# EAGLE board fpc2n64a_v3 (EAGLE 9.0.1)
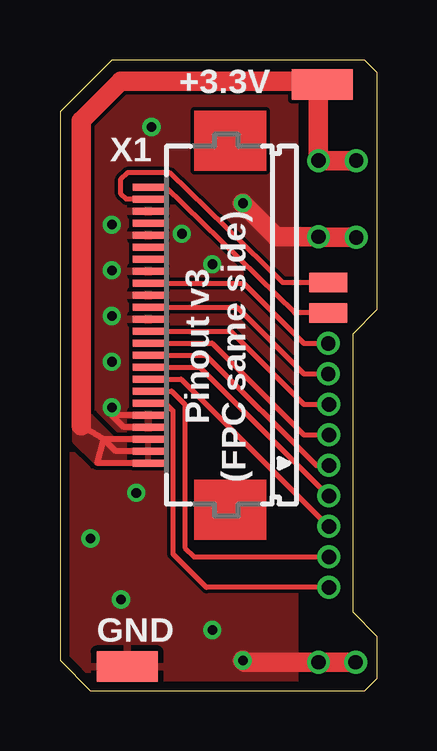
[diagram p0: board, top side]
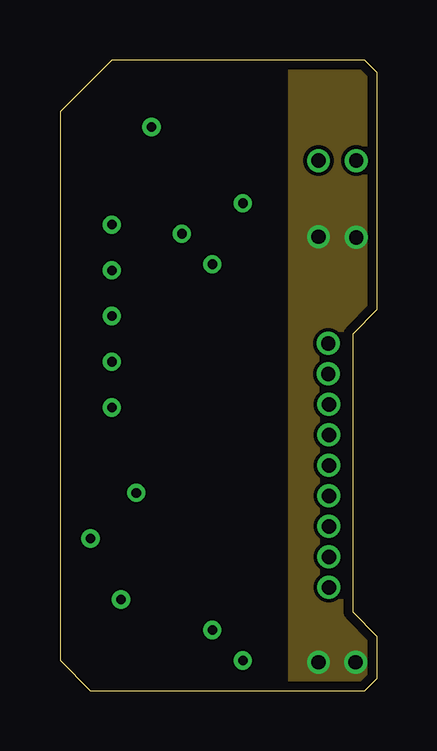
[diagram p1: board, inner layer Route2]
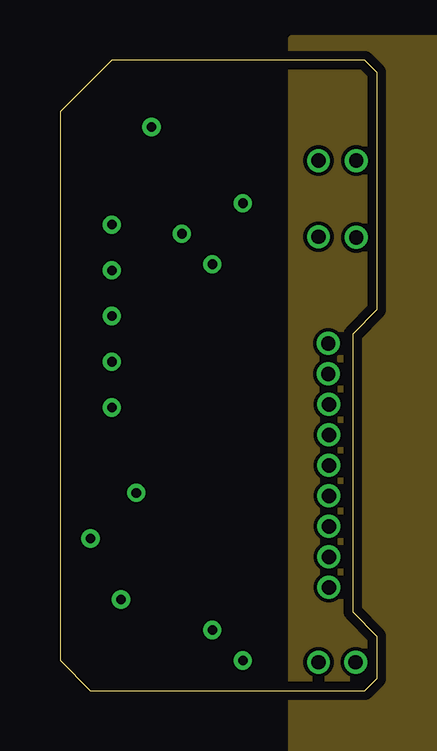
[diagram p2: board, inner layer Route15]
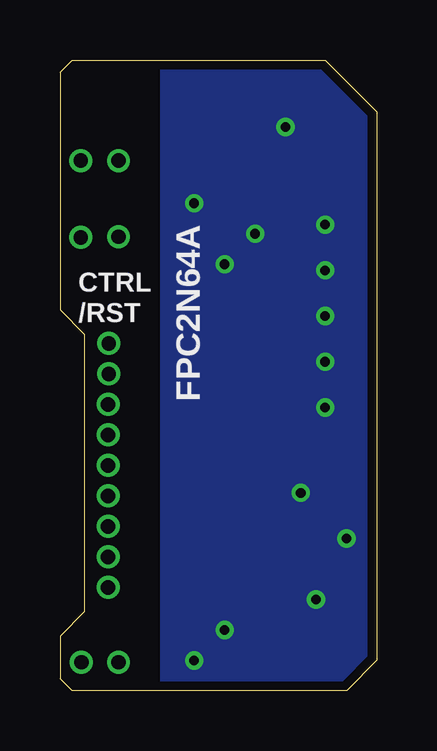
[diagram p3: board, bottom side, seen from below]

Size 13.21 x 26.29 mm. Coordinates in mm from the lower left corner, seen from the top.
Outline: 12.7,0 13.21,0.51 13.21,2.29 12.19,3.3 12.19,14.86 13.21,15.88 13.21,25.78 12.7,26.29 2.16,26.29 0,24.13 0,1.27 1.27,0 12.7,0
Copper layers (1*16): Top 0.0356mm / dielectric 1.5011mm / Bottom 0.0356mm
Design rules "LaenPCBOrder": minimum track width 6mil, minimum drill 13mil, track to track 6mil, track to pad 6mil, pad to pad 6mil, via to via 6mil, smd to smd 6mil, copper to edge 15mil, drill to drill 6mil, minimum pad ring 7mil, minimum via ring 7mil, stop-mask expansion 3mil, vias tented up to drill 30mil, thermal gap 10mil

## Footprints (pad centres in the part's own frame; a part is rotated, then mirrored left to right if it is on the bottom)
SMD0,8-1,6 = smd 0.8 x 1.6: P$1 0,0
SMD1,27-2,54 = smd 1.27 x 2.54: 1 0,0
FH12-24S-0.5SH = smd 0.3 x 1.3: 1 -5.75,3.25; 2 -5.25,3.25; 3 -4.75,3.25; 4 -4.25,3.25; 5 -3.75,3.25; 6 -3.25,3.25; 7 -2.75,3.25; 8 -2.25,3.25; 9 -1.75,3.25; 10 -1.25,3.25; 11 -0.75,3.25; 12 -0.25,3.25; 13 0.25,3.25; 14 0.75,3.25; 15 1.25,3.25; 16 1.75,3.25; 17 2.25,3.25; 18 2.75,3.25; 19 3.25,3.25; 20 3.75,3.25; 21 4.25,3.25; 22 4.75,3.25; 23 5.25,3.25; 24 5.75,3.25

## Placement (x,y rotation side)
/RST  [SMD0,8-1,6]  11.18,15.75 90 top
CTRL  [SMD0,8-1,6]  11.18,17.02 90 top
GND  [SMD1,27-2,54]  2.79,1.02 270 top
VCC  [SMD1,27-2,54]  10.92,25.27 90 top
X1  [FH12-24S-0.5SH]  6.93,15.24 90 top

## Library data of the parts
/RST CTRL = wirepad
GND VCC = wirepad@1
X1 = con-hirose

## Nets
3V3: VCC.1 X1.1 X1.2 X1.3
#DSYNC: X1.14
#RST: /RST.P$1 X1.24
CTRL: CTRL.P$1 X1.23
D0: X1.6
D1: X1.7
D2: X1.8
D3: X1.9
D4: X1.10
D5: X1.11
D6: X1.12
GND: GND.1 X1.4 X1.5 X1.13 X1.15 X1.17 X1.20 X1.22
VCLK: X1.16

## Tracks (layer width: path | path; a pad name or v marks a point on that pad's centre or on a via)
3V3  (via drill 0.6)
  Top 0.254: X1.3 1.83,10.49 | 1.83,10.49 0.89,11.05 | X1.2 2.33,9.99 1.83,10.49 | X1.1 1.56,9.49 1.83,10.49
  Top 0.813: v12.34,22.1 v10.77,22.1 10.77,24.92 VCC.1 10.29,25.4 2.54,25.4 0.89,23.75 0.89,11.05
  pour Top (rank 5): 4.19,9.52 1.52,9.52 0.63,10.41 0.63,11.43 1.27,11.43 2.29,10.41 4.19,10.41
#DSYNC  (via drill 0.6)
  Top 0.203: X1.14 7.38,15.99 10.16,13.21 v11.18,13.21
#RST
  Top 0.203: X1.24 4.41,20.99 9.78,15.75 /RST.P$1
CTRL
  Top 0.203: X1.23 2.75,20.49 2.54,20.7 2.54,21.34 2.79,21.59 4.57,21.59 9.27,17.02 CTRL.P$1
D0  (via drill 0.6)
  Top 0.203: X1.6 4.39,11.99 4.7,11.68 4.7,5.71 6.1,4.32 11.18,4.32 v11.2,4.32
D1  (via drill 0.6)
  Top 0.203: 11.18,5.59 v11.2,5.59 5.59,5.59 5.21,5.97 5.21,11.94 4.66,12.49 X1.7
D2  (via drill 0.6)
  Top 0.203: v11.2,6.86 11.18,6.86 5.04,12.99 X1.8
D3  (via drill 0.6)
  Top 0.203: X1.9 5.81,13.49 11.18,8.13 v11.2,8.13
D4  (via drill 0.6)
  Top 0.203: X1.10 6.08,13.99 10.67,9.4 v11.2,9.4
D5  (via drill 0.6)
  Top 0.203: 11.18,10.67 v11.2,10.67 10.16,10.67 6.34,14.49 X1.11
D6  (via drill 0.6)
  Top 0.203: 11.18,11.94 v11.2,11.94 10.16,11.94 7.11,14.99 X1.12
GND  (via drill 0.4, 0.6)
  Top 0.254: X1.5 2.16,11.49 | 2.16,11.49 v2.16,11.81 | X1.4 2.66,10.99 2.16,11.49
  Top 0.813: v12.32,1.19 v10.77,1.19 7.7,1.19 v7.62,1.27 | v12.34,18.9 10.79,18.9 v10.77,18.92 9.02,18.92 v7.62,20.32
  other vias: 2.16,19.43 5.08,19.05 6.35,17.78 2.16,17.53 2.16,15.62 2.16,13.72 1.27,6.35 2.54,3.81 3.17,8.25 6.35,2.54 3.81,23.49
  pour Route2 (rank 2): 9.65,-10.92 75.69,-10.92 75.69,27.18 9.65,27.18
  pour Bottom (rank 6): 0,0 8.89,0 8.89,26.67 0,26.67
  pour Top (rank 6): 0,0 9.78,0 9.78,26.67 0,26.67
VCCIO
  pour Route15 (rank 4): 19.43,27.18 19.43,22.35 22.61,22.35 22.61,27.18 75.69,27.18 75.69,-10.92 9.65,-10.92 9.65,27.18
VCLK  (via drill 0.6)
  Top 0.203: X1.16 7.65,16.99 10.16,14.48 v11.18,14.48

## Text on the board
tPlace: Pinout v3 / (FPC same side)
tNames: +3.3V | GND
bNames: FPC2N64A